# Altium PCB NaiS6202HD_0.7.PcbDoc (part 1 of 2)
Units mm, origin at the board's own origin, x right, y up, seen from the top; angles counter-clockwise.
Board outline 60 x 38 mm, 4 copper layers (Top, INT1, GND, Bottom), stack 0.965 mm thick; 148 components, 224 nets, 688 pads, 333 vias.
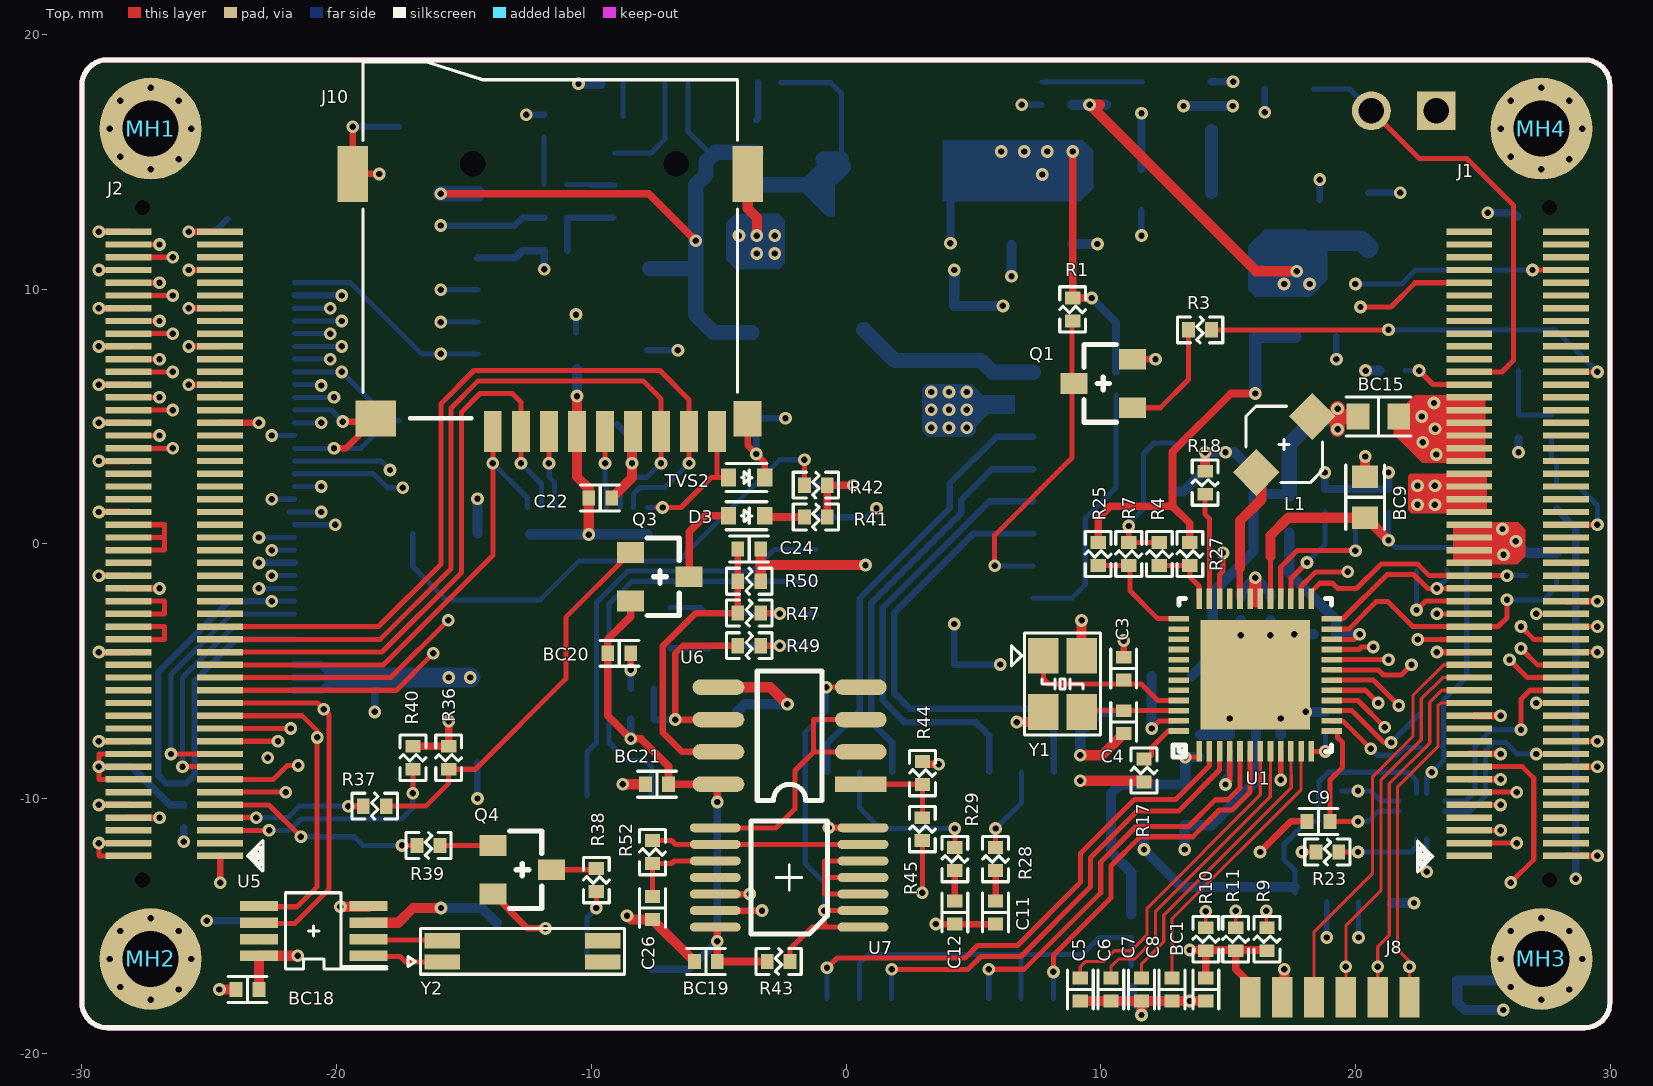
[diagram p0: Top view]
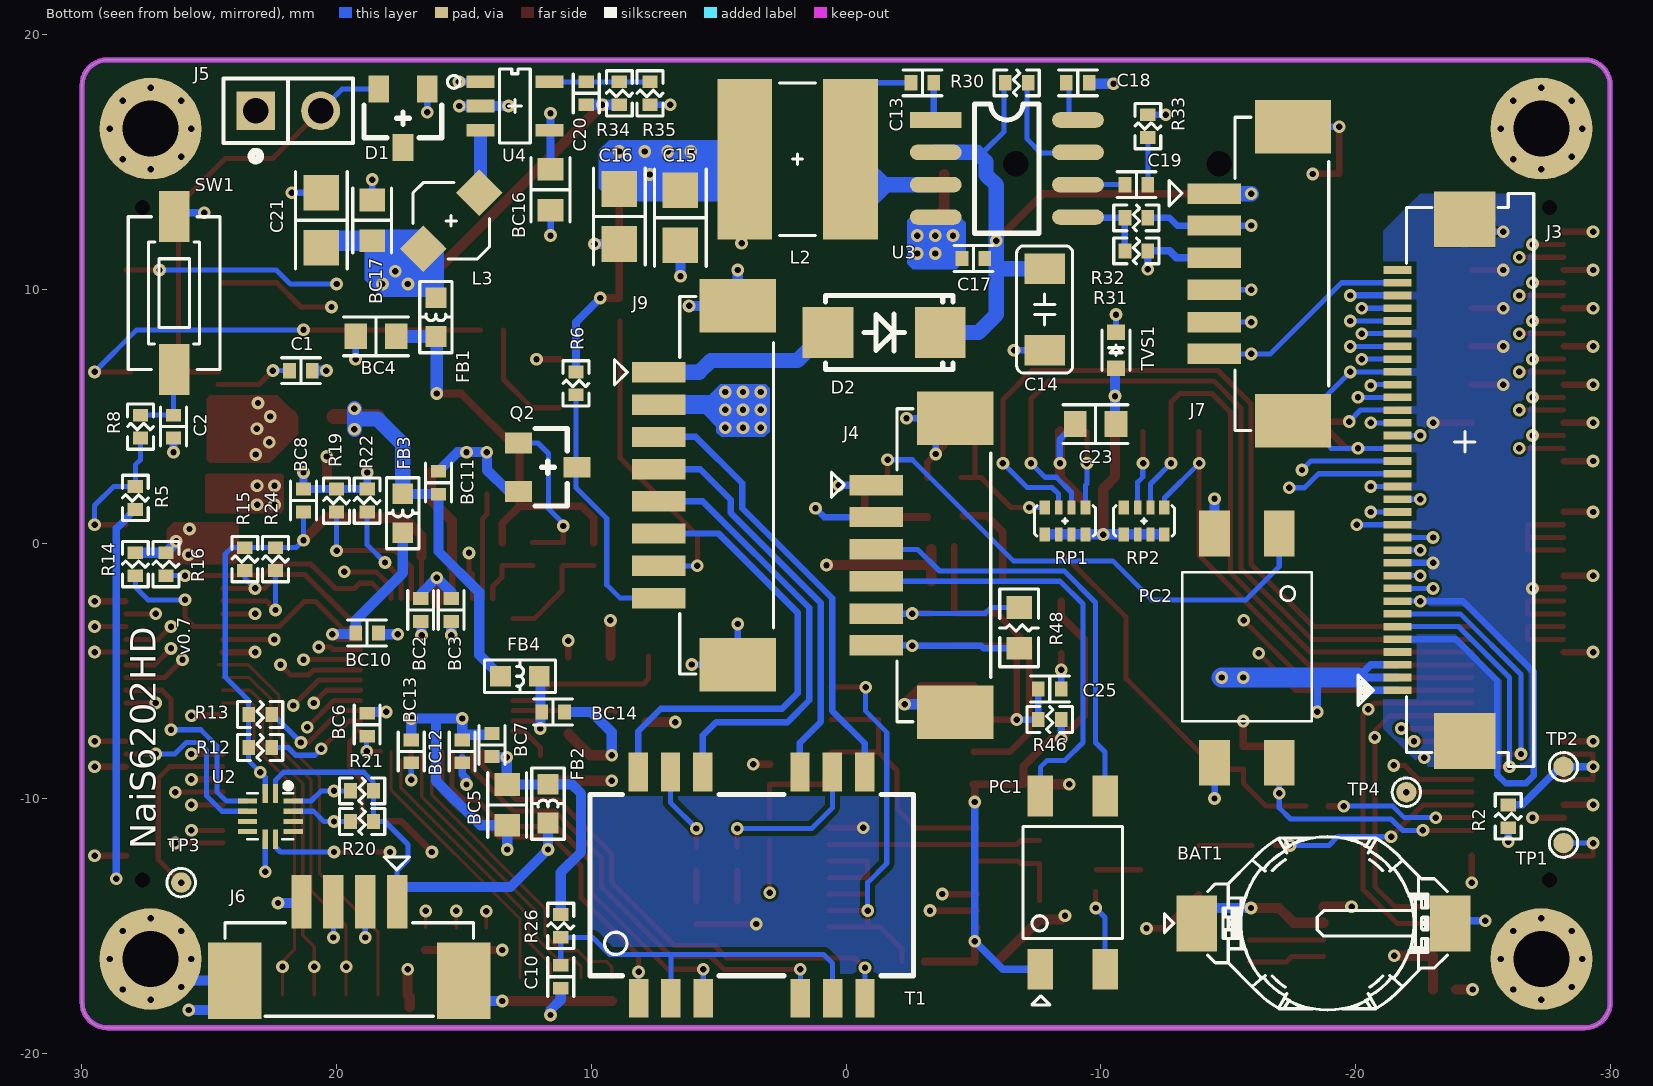
[diagram p1: Bottom view, seen from below]
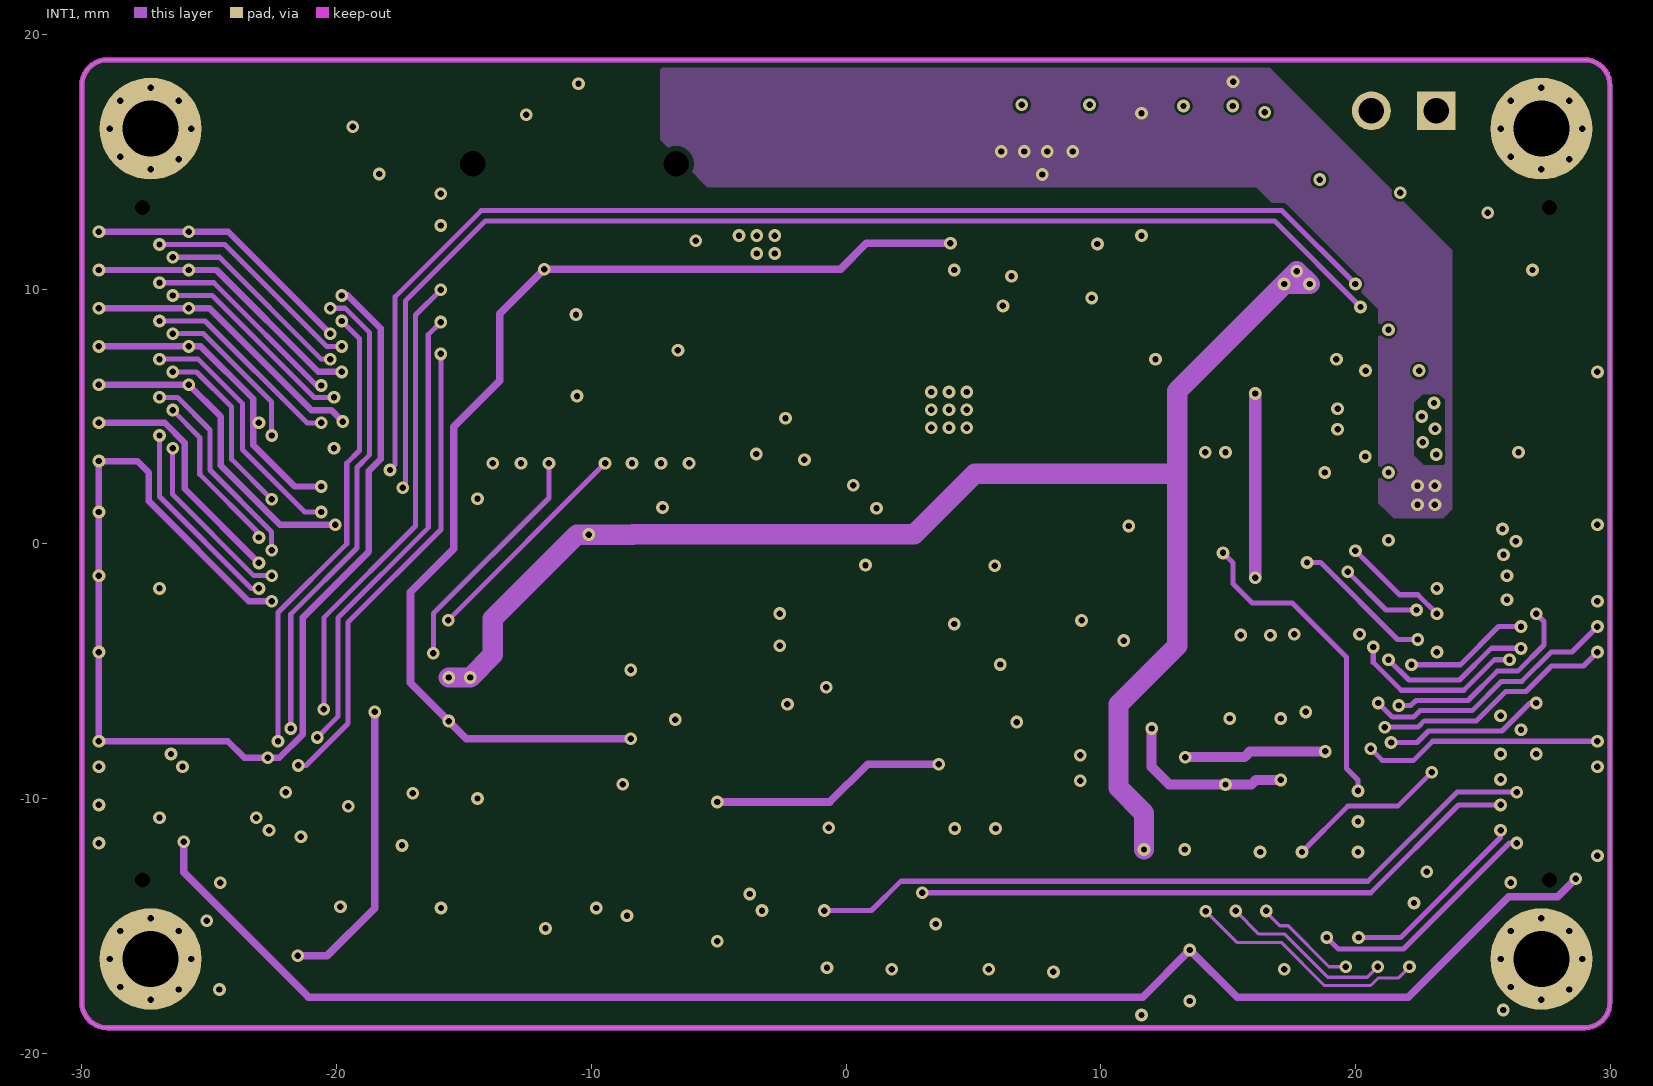
[diagram p2: INT1]
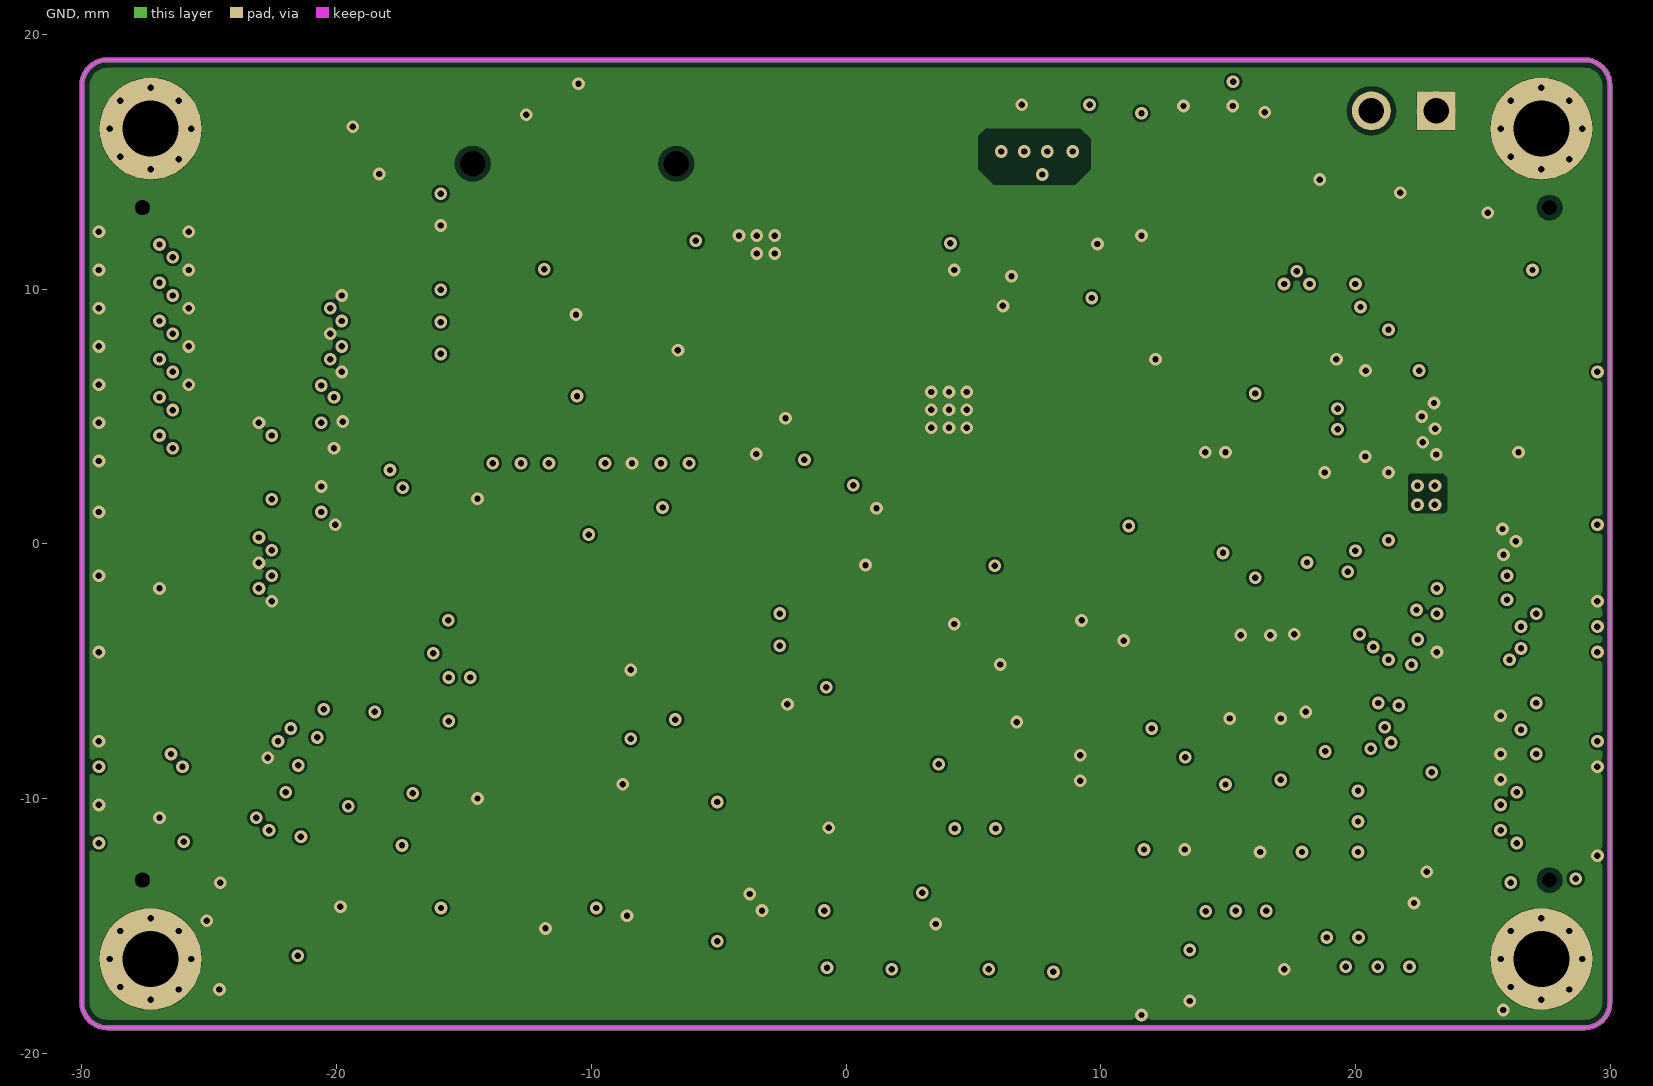
[diagram p3: GND]

## Layer stack, top to bottom
Solder Mask Top: solder mask 0.0102, Solder Resist, Dk 3.5
Top: signal copper 0.0343
Dielectric 1: dielectric 0.254, FR-4, Dk 4.3
INT1: signal copper 0.0343
Dielectric2: dielectric 0.254, FR-4, Dk 4.3
GND: signal copper 0.0343
Dielectric4: dielectric 0.32, FR-4, Dk 4.8
Bottom: signal copper 0.0343
Solder Mask Bottom: solder mask 0.0102, Solder Resist, Dk 3.5

## Board outline
-30,-18 -30,18 cw(c-29,18) -29,19 28.994,19 cw(c28.994,18) 29.994,18 30,18 30,-18 29.994,-18 cw(c28.994,-18) 28.994,-19 -29,-19 cw(c-29,-18)

## Design rules (kind name [scope] priority, off if disabled: settings)
AssemblyTestPointUsage [All] p1 off:
AssemblyTestpoint [All] p1 off: testpointundercomponent=TRUE minsize=1.016 maxsize=2.54 preferedsize=1.524 minholesize=0 maxholesize=1.016 preferedholesize=0.813 testpointgrid=0.025 usegrid=TRUE gridtolerance=0 allowsidetop=TRUE allowsidebottom=TRUE
Clearance Clearance_6 [InNet('+12V') or InNet('N21617464') or InNet('+5.0V')  or InNet('+3.3V') vs IsFill] p1: gap=0.4
Clearance Clearance_4 [InComponent('MH1') OR InComponent('MH2') OR InComponent('MH3') OR InComponent('MH4') or INnet('GND') vs OnLayer('Keep-Out Layer')] p2: gap=0
Clearance Clearance_3 [InComponent('U1') or InComponent('RP1') or InComponent('RP2') or  HasFootprint('CS-0603')] p3: gap=0.127
Clearance Clearance_2 [OnLayer('Keep-Out Layer') vs InNet('GND')] p4: gap=0.1
Clearance Clearance_1 [IsVia] p5: gap=0.1
Clearance [All] p6: gap=0.2
ComponentClearance [All] p1: gap=0.01 collisioncheckmode=3 verticalgap=0 showdistances=FALSE
DiffPairsRouting [All] p1 off: maxlimit=0.254 minlimit=0.2 mostfreqgap=0.254 toplayer_prefgap=0.2 toplayer_minwidth=0.2 toplayer_maxwidth=0.381 toplayer_prefwidth=0.254 midlayer1_mingap=0.254 midlayer1_minwidth=0.381 midlayer1_maxwidth=0.381 midlayer1_prefwidth=0.381 midlayer2_mingap=0.254 midlayer2_minwidth=0.381 midlayer2_maxwidth=0.381 midlayer2_prefwidth=0.381 bottomlayer_prefgap=0.2 bottomlayer_minwidth=0.2 bottomlayer_maxwidth=0.381 bottomlayer_prefwidth=0.254 maxuncoupledlength=12.7
FabricationTestPointUsage [All] p1 off: valid=0 allowmultiple=FALSE
FabricationTestpoint [All] p1 off: side=3 testpointundercomponent=TRUE minsize=1.016 maxsize=2.54 preferedsize=1.524 minholesize=0 maxholesize=1.016 preferedholesize=0.813 testpointgrid=0.025 allowsidetop=TRUE allowsidebottom=TRUE usegrid=TRUE gridtolerance=0
FanoutControl Fanout_BGA [IsBGA] p1 off: bgadir=Out bgaviamode=Centered fanoutstyle=Auto fanoutdirection=Alternating viagrid=0.025 // Fanout_BGA (Default Rule)
FanoutControl Fanout_SOIC [IsSOIC] p3 off: bgadir=Out bgaviamode=Centered fanoutstyle=Auto fanoutdirection=Alternating viagrid=0.025 // Fanout_SOIC (Default Rule)
FanoutControl Fanout_Small [(CompPinCount < 5)] p4 off: bgadir=Out bgaviamode=Centered fanoutstyle=Auto fanoutdirection=OutThenIn viagrid=0.025 // Fanout_Small (Default Rule)
FanoutControl Fanout_Default [All] p5 off: bgadir=Out bgaviamode=Centered fanoutstyle=Auto fanoutdirection=Alternating viagrid=0.025 // Fanout_Default (Default Rule)
Height [All] p1 off: minheight=0 maxheight=25.4 prefheight=12.7
HoleSize [All] p1: absolutevalues=TRUE maxlimit=5 minlimit=0.25 maxpercent=80.000 minpercent=20.000
HoleToHoleClearance [All] p1: gap=0.2 allowstackedmicrovias=TRUE
MinimumSolderMaskSliver [All] p1: minsoldermaskwidth=0
PasteMaskExpansion [All] p1 off: expansion=0
PermittedLayers [All] p1 off: toplayerpermitted=TRUE bottomlayerpermitted=TRUE
PlaneClearance [InNet('GND')] p1 off: clearance=0.508
PlaneConnect [All] p1 off: planeconnectstyle=Direct reliefexpansion=0.508 reliefentries=4 reliefconductorwidth=0.254 reliefairgap=0.254
PolygonConnect [All] p1 off: connectstyle=Direct reliefconductorwidth=0.254 reliefentries=4 polygonreliefangle="90 Angle" airgapwidth=0.1
RoutingVias [All] p1: holewidth=0.25 width=0.5 viastyle="Through Hole" minholewidth=0.25 minwidth=0.5 maxholewidth=0.25 maxwidth=0.5
ShortCircuit [All] p1 off: allowed=FALSE
SilkToSilkClearance [All] p1: silktosilkclearance=0
SilkToSolderMaskClearance [IsPad] p1: minsilkscreentomaskgap=0 clearancetoexposedcopper=TRUE
SolderMaskExpansion [All] p1: expansion=0.102
Width Width_1 [(InNet('VDD_3.3V') OR InNet('AVDD') OR InNet('OVDD') OR InNet('DVDD'))] p1: maxlimit=2 minlimit=0.2 preferedwidth=2
Width [All] p2: maxlimit=1 minlimit=0.1 preferedwidth=0.2
9 further rules are at their usual default settings.

## Components (designator, comment, footprint, x,y, rotation, side; value= is the part's Value field where it differs from the comment)
BAT1 "CN048S-0005//SMD_BAT_HOLDER" BAT-CN048S -18.75,-14.9 r90 bottom
BC1 "0.1uF" CS-1005 14.127,-17.5 r270 top
BC2 "0.1uF" CS-1005 16.7,-2.6 r270 bottom
BC3 "0.1uF" CS-1005 15.5,-2.6 r270 bottom
BC4 "10uF" CS-1608 18.452,8.148 r0 bottom
BC5 "10uF" CS-1608 13.3,-10.25 r270 bottom
BC6 "0.1uF" CS-1005 18.8,-7.1 r90 bottom
BC7 "0.1uF" CS-1005 13.9,-7.9 r90 bottom
BC8 "0.1uF" CS-1005 21.3,1.7 r90 bottom
BC9 "10uF" CS-1608 20.381,1.827 r90 top
BC10 "0.1uF" CS-1005 18.8,-3.5 r180 bottom
BC11 "0.1uF" CS-1005 16,2.4 r90 bottom
BC12 "0.1uF" CS-1005 15.068,-8.149 r90 bottom
BC13 "0.1uF" CS-1005 17.068,-8.149 r90 bottom
BC14 "0.1uF" CS-1005 11.5,-6.6 r180 bottom
BC15 "10uF" CS-1608 20.9,5 r0 top
BC16 "0.1uF" CS-1608 11.6,13.9 r90 bottom
BC17 "1uF" CS-1608 18.6,12.7 r270 bottom
BC18 "0.1uF" CS-1005 -23.5,-17.5 r0 top
BC19 "0.1uF" CS-1005 -5.5,-16.4 r0 top
BC20 "0.1uF" CS-1005 -8.9,-4.3 r180 top
BC21 "0.1uF" CS-1005 -7.419,-9.439 r0 top
C1 "0.1uF" CS-1005 21.4,6.8 r0 bottom
C2 "1nF/NI" CS-1005 26.4,4.6 r270 bottom
C3 "12pF" CS-1005 10.9,-4.9 r270 top
C4 "12pF" CS-1005 10.9,-7 r90 top
C5 "0.1uF" CS-1005 9.2,-17.5 r270 top
C6 "0.1uF" CS-1005 10.4,-17.5 r270 top
C7 "0.1uF" CS-1005 11.6,-17.5 r270 top
C8 "0.1uF" CS-1005 12.8,-17.5 r270 top
C9 "0.1uF" CS-1005 18.55,-10.9 r180 top
C10 "0.1uF" CS-1005 11.2,-17 r270 bottom
C11 "0.1uF" CS-1005 5.873,-14.477 r270 top (schematic designator c11)
C12 "0.1uF" CS-1005 4.273,-14.477 r270 top
C13 "10nF" CS-1005 -3,18.1 r0 bottom
C14 "4.7uF-25V-3216" C3216 -7.8,9.2 r270 bottom
C15 "22uF-6.3V" CS-2012 6.5,12.8 r270 bottom
C16 "22uF-6.3V" CS-2012 8.9,12.85 r270 bottom
C17 "0.1uF" CS-1005 -5,11.2 r0 bottom
C18 "0.1uF" CS-1005 -9.1,18.1 r180 bottom
C19 "3.3nF" CS-1005 -11.4,14.1 r180 bottom
C20 "22pF" CS-1005 10.198,17.687 r90 bottom
C21 "22uF-6.3V" CS-2012 20.6,12.7 r90 bottom
C22 "0.1uF" CS-1005 -9.65,1.8 r0 top
C23 "22uF" CS-1608 -9.8,4.7 r0 bottom
C24 "2.2nF" CS-1005 -3.8,-0.2 r180 top
C25 "2.2nF" CS-1005 -8,-5.7 r0 bottom
C26 "1nF" CS-1005 -7.6,-14.3 r90 top
D1 "BAT54A" SOT-23 17.4,16.7 r270 bottom
D2 "RB051L-40" SOD-106 -1.5,8.3 r180 bottom
D3 "1N4148" SOD-523 -3.9,1.1 r180 top
FB1 "220R" LS-1608 16.1,8.9 r270 bottom
FB2 "220R" LS-1608 11.7,-10.2 r90 bottom
FB3 "220R" LS-1608 17.4,1.2 r270 bottom
FB4 "220R" LS-1608 12.8,-5.2 r180 bottom
J1 "LB222-G100S-BOR" BTB2X50-050-F-SMD 26.37,0 r180 top locked
J2 "LB208-G100P-BOR" BTB2X50-050-M-SMD -26.37,0 r180 top locked
J3 "05003HR-H34E" 05003HR-H34E -24.3,4 r270 bottom locked
J4 "12505WS-06" 12505WS-6P -2.732,-0.844 r270 bottom
J5 "PH-2PSM//NI" PH-2PSM 21.9,17 r90 bottom
J6 "12505WR-4P" 12505WS-4P 19.5,-15.6 r180 bottom
J7 "12505WS-06" 12505WS-6P -16,10.6 r270 bottom
J8 "6pin 2.54mm//NI" TP_HEADER_6 19,-17.8 r0 top
J9 "12505WS08" 12505WS-8P 5.8,2.3 r270 bottom
J10 "112J-TXAR-R" CON_U-SD -13.866,4.412 r0 top locked
L1 "CDRH2D14NP-2R2NC" CDRH2D14NP 17.2,3.9 r0 top
L2 "CDRH5D18NP-100NC-10uH" CDRH5D18NP 1.9,15.1 r180 bottom
L3 "CDRH2D14NP-2R2NC" CDRH2D14NP 15.5,12.679 r180 bottom
MH1 "4.04pi" VA-2.2 -27.3,16.3 r0 top locked
MH2 "4.04pi" VA-2.2 -27.3,-16.3 r0 top locked
MH3 "4.04pi" VA-2.2 27.3,-16.3 r0 top locked
MH4 "4.04pi" VA-2.2 27.3,16.3 r0 top locked
PC1 "ASSR-4118" ASSR-4118 -8.9,-13.3 r180 bottom
PC2 "PC817" PC817 -15.8,-4.1 r270 bottom
Q1 "MMBT6427" SOT-23 10.092,6.3 r180 top
Q2 "MMBT6427" SOT-23 11.7,3 r180 bottom
Q3 "MMBT3906" SOT-23 -7.3,-1.3 r0 top
Q4 "MMBT6427" SOT-23 -12.7,-12.8 r0 top
R1 "2.2K" RS-1005 8.9,9.2 r90 top
R2 "0" RS-1005 -26,-10.7 r90 bottom
R3 "10K" RS-1005 13.9,8.4 r0 top
R4 "10K" RS-1005 12.3,-0.4 r270 top
R5 "10K" RS-1005 27.9,1.8 r270 bottom
R6 "2.2K" RS-1005 10.6,6.3 r90 bottom
R7 "10K" RS-1005 11.1,-0.4 r270 top
R8 "0" RS-1005 27.7,4.6 r90 bottom
R9 "4.7K" RS-1005 16.527,-15.523 r270 top
R10 "4.7K" RS-1005 14.127,-15.523 r270 top
R11 "4.7K" RS-1005 15.3,-15.523 r270 top
R12 "4.7K" RS-1005 23,-8 r180 bottom
R13 "4.7K" RS-1005 23,-6.7 r180 bottom
R14 "4.7K" RS-1005 27.9,-0.8 r270 bottom
R15 "4.7K" RS-1005 23.6,-0.6 r270 bottom
R16 "4.7K" RS-1005 26.7,-0.8 r270 bottom
R17 "2.49K, 1%" RS-1005 11.7,-8.9 r90 top
R18 "4.7K" RS-1005 14.1,2.4 r270 top
R19 "4.7K" RS-1005 20,1.7 r270 bottom
R20 "40.2K" RS-1005 19,-10.9 r0 bottom
R21 "10K" RS-1005 19,-9.7 r180 bottom
R22 "4.7K" RS-1005 18.8,1.7 r270 bottom
R23 "2.2K" RS-1005 18.9,-12.1 r180 top
R24 "4.7K" RS-1005 22.4,-0.6 r90 bottom
R25 "4.7K" RS-1005 9.9,-0.4 r270 top
R26 "0//NI" RS-1005 11.2,-15 r270 bottom
R27 "4.7K" RS-1005 13.5,-0.4 r90 top
R28 "75" RS-1005 5.873,-12.377 r90 top
R29 "75" RS-1005 4.273,-12.377 r90 top
R30 "100K" RS-1005 -6.7,18.1 r180 bottom
R31 "45K, 1%" RS-1005 -11.4,11.5 r0 bottom
R32 "10K, 1%" RS-1005 -11.4,12.8 r0 bottom
R33 "2.2K" RS-1005 -11.85,16.4 r270 bottom
R34 "150K, 1%" RS-1005 8.898,17.687 r270 bottom
R35 "33.3K, 1%" RS-1005 7.698,17.687 r90 bottom
R36 "10K" RS-1005 -15.6,-8.4 r270 top
R37 "1K" RS-1005 -18.5,-10.3 r0 top
R38 "330" RS-1005 -9.8,-13.2 r90 top
R39 "1K" RS-1005 -16.391,-11.841 r0 top
R40 "10K" RS-1005 -17,-8.4 r90 top
R41 "330" RS-1005 -1.182,1.051 r180 top
R42 "2.2K" RS-1005 -1.182,2.301 r180 top
R43 "10K" RS-1005 -2.644,-16.4 r180 top
R44 "10K" RS-1005 3,-9 r90 top
R45 "100" RS-1005 2.998,-11.202 r90 top
R46 "10K" RS-1005 -8,-6.9 r180 bottom
R47 "47" RS-1005 -3.8,-2.719 r0 top
R48 "120/NI" RS-1608 -6.8,-3.3 r90 bottom
R49 "47" RS-1005 -3.8,-4 r0 top
R50 "10K" RS-1005 -3.8,-1.469 r180 top
R52 "100" RS-1005 -7.6,-12.1 r90 top
RP1 "10K" RP-4_1005 -8.6,0.9 r180 bottom
RP2 "10K" RP-4_1005 -11.7,0.9 r180 bottom
SW1 "SW PB" SWS-CTT-1131U 26.378,9.843 r90 bottom
T1 "TRC41604NL" TRC41604NL 3.706,-13.4 r180 bottom
TP1 "TPS" TP_0.8_SMD -28.17,-11.75 r90 bottom
TP2 "TPS" TP_0.8_SMD -28.17,-8.75 r90 bottom
TP3 "TPS" TP_0.8_SMD 26.1,-13.3 r90 bottom
TP4 "TPS" TP_0.8_SMD -22,-9.75 r90 bottom
TVS1 "ESD5B5.0ST1G" SOD-523 -10.6,7.6 r270 bottom
TVS2 "ESD5B5.0ST1G" SOD-523 -3.9,2.6 r180 top
U1 "YT8521SH" QFN48_6x6 16.068,-5.149 r90 top
U2 "SGM4574YUQN12G/TR" UTQFN-1.8】1.8-12L 22.6,-10.7 r270 bottom
U3 "MP1482" SOIC-8 -6.3,14.7 r270 bottom
U4 "AME5253-AEVADJ" SOT-23-5P 12.998,17.187 r270 bottom
U5 "DS1339U-33" TSSOP8-M -20.9,-15.2 r90 top
U6 "MAX3485ESA" SOIC-8 -2.2,-7.5 r90 top
U7 "74HC00MTCX" TSSOP-14 -2.232,-13.1 r180 top
Y1 "25MHz-S20P-SX32" SX-32 8.5,-5.5 r90 top
Y2 "32.768KHz-MC-146-7pF" XTS-MC-146 -12.7,-16 r0 top

## Footprints (in the part's own frame and the unit in brackets; to place one, negate y for a bottom-side part, rotate by r counter-clockwise, add the part's x,y. Pads: shape width x height; smd on the part's side, far side on the other; paste and mask are expansions set on the pad)
05003HR-H34E [mm]
  rect 0.3x1.1 smd: 1(9.75,-2.65) 2(9.25,-2.65) 3(8.75,-2.65) 4(8.25,-2.65) 5(7.75,-2.65) 6(7.25,-2.65) 7(6.75,-2.65) 8(6.25,-2.65) 9(5.75,-2.65) 10(5.25,-2.65) 11(4.75,-2.65) 12(4.25,-2.65) 13(3.75,-2.65) 14(3.25,-2.65) 15(2.75,-2.65) 16(2.25,-2.65) 17(1.75,-2.65) 18(1.25,-2.65) 19(0.75,-2.65) 20(0.25,-2.65) 21(-0.25,-2.65) 22(-0.75,-2.65) 23(-1.25,-2.65) 24(-1.75,-2.65) 25(-2.25,-2.65) 26(-2.75,-2.65) 27(-3.25,-2.65) 28(-3.75,-2.65) 29(-4.25,-2.65) 30(-4.75,-2.65) 31(-5.25,-2.65) 32(-5.75,-2.65) 33(-6.25,-2.65) 34(-6.75,-2.65)
  rect 2.184x2.413 smd: M1(11.744,-0.006) M2(-8.744,-0.006)
  silkscreen extent -9.75,-4.19 12.75,2.7
12505WS-4P [mm]
  rect 0.8x2.1 smd: 1(1.875,1.55) 2(0.625,1.55) 3(-0.625,1.55) 4(-1.875,1.55)
  rect 2.1x3 smd: 5(-4.5,-1.55) 6(4.5,-1.55)
  silkscreen extent -4.87,-2.95 4.87,3.3
12505WS-6P [mm]
  rect 0.8x2.1 smd: 1(-3.145,-1.55) 2(-1.895,-1.55) 3(-0.625,-1.55) 4(0.625,-1.55) 5(1.895,-1.55) 6(3.145,-1.55)
  rect 2.1x3 smd: M1(-5.77,1.55) M2(5.77,1.55)
  silkscreen extent -6.14,-3.31 6.14,2.95
12505WS-8P [mm]
  rect 0.8x2.1 smd: 1(-4.435,-1.55) 2(-3.165,-1.55) 3(-1.895,-1.55) 4(-0.625,-1.55) 5(0.625,-1.55) 6(1.895,-1.55) 7(3.165,-1.55) 8(4.435,-1.55)
  rect 2.1x3 smd: 9(-7.04,1.55) 10(7.04,1.55)
  silkscreen extent -7.41,-3.29 7.41,2.95
ASSR-4118 [mm]
  rect 1x1.6 smd: 1(-1.27,-3.4) 2(1.27,-3.4) 3(1.27,3.4) 4(-1.27,3.4)
  silkscreen extent -1.95,-4.8 1.95,2.2
BAT-CN048S [mm]
  rect 2.2x1.6 smd: 1(0,4.975) 2(0,-4.975)
  silkscreen extent -3.4,-4.85 3.4,6.25, body extent -3.39,-5.22 3.31,5.18, height 2.8
BTB2X50-050-F-SMD [mm]
  rect 1.8x0.25 smd: 1(1.9,12.25) 2(-1.9,12.25) 3(1.9,11.75) 4(-1.9,11.75) 5(1.9,11.25) 6(-1.9,11.25) 7(1.9,10.75) 8(-1.9,10.75) 9(1.9,10.25) 10(-1.9,10.25) 11(1.9,9.75) 12(-1.9,9.75) 13(1.9,9.25) 14(-1.9,9.25) 15(1.9,8.75) 16(-1.9,8.75) 17(1.9,8.25) 18(-1.9,8.25) 19(1.9,7.75) 20(-1.9,7.75) 21(1.9,7.25) 22(-1.9,7.25) 23(1.9,6.75) 24(-1.9,6.75) 25(1.9,6.25) 26(-1.9,6.25) 27(1.9,5.75) 28(-1.9,5.75) 29(1.9,5.25) 30(-1.9,5.25) 31(1.9,4.75) 32(-1.9,4.75) 33(1.9,4.25) 34(-1.9,4.25) 35(1.9,3.75) 36(-1.9,3.75) 37(1.9,3.25) 38(-1.9,3.25) 39(1.9,2.75) 40(-1.9,2.75) 41(1.9,2.25) 42(-1.9,2.25) 43(1.9,1.75) 44(-1.9,1.75) 45(1.9,1.25) 46(-1.9,1.25) 47(1.9,0.75) 48(-1.9,0.75) 49(1.9,0.25) 50(-1.9,0.25) 51(1.9,-0.25) 52(-1.9,-0.25) 53(1.9,-0.75) 54(-1.9,-0.75) 55(1.9,-1.25) 56(-1.9,-1.25) 57(1.9,-1.75) 58(-1.9,-1.75) 59(1.9,-2.25) 60(-1.9,-2.25) 61(1.9,-2.75) 62(-1.9,-2.75) 63(1.9,-3.25) 64(-1.9,-3.25) 65(1.9,-3.75) 66(-1.9,-3.75) 67(1.9,-4.25) 68(-1.9,-4.25) 69(1.9,-4.75) 70(-1.9,-4.75) 71(1.9,-5.25) 72(-1.9,-5.25) 73(1.9,-5.75) 74(-1.9,-5.75) 75(1.9,-6.25) 76(-1.9,-6.25) 77(1.9,-6.75) 78(-1.9,-6.75) 79(1.9,-7.25) 80(-1.9,-7.25) 81(1.9,-7.75) 82(-1.9,-7.75) 83(1.9,-8.25) 84(-1.9,-8.25) 85(1.9,-8.75) 86(-1.9,-8.75) 87(1.9,-9.25) 88(-1.9,-9.25) 89(1.9,-9.75) 90(-1.9,-9.75) 91(1.9,-10.25) 92(-1.9,-10.25) 93(1.9,-10.75) 94(-1.9,-10.75) 95(1.9,-11.25) 96(-1.9,-11.25) 97(1.9,-11.75) 98(-1.9,-11.75) 99(1.9,-12.25) 100(-1.9,-12.25)
  round 0.5 hole 0.6: M1(-1.25,-13.2) M2(-1.25,13.2)
  silkscreen extent 3.32,11.67 3.92,12.87
BTB2X50-050-M-SMD [mm]
  rect 1.8x0.25 smd: 1(-1.8,12.25) 2(1.8,12.25) 3(-1.8,11.75) 4(1.8,11.75) 5(-1.8,11.25) 6(1.8,11.25) 7(-1.8,10.75) 8(1.8,10.75) 9(-1.8,10.25) 10(1.8,10.25) 11(-1.8,9.75) 12(1.8,9.75) 13(-1.8,9.25) 14(1.8,9.25) 15(-1.8,8.75) 16(1.8,8.75) 17(-1.8,8.25) 18(1.8,8.25) 19(-1.8,7.75) 20(1.8,7.75) 21(-1.8,7.25) 22(1.8,7.25) 23(-1.8,6.75) 24(1.8,6.75) 25(-1.8,6.25) 26(1.8,6.25) 27(-1.8,5.75) 28(1.8,5.75) 29(-1.8,5.25) 30(1.8,5.25) 31(-1.8,4.75) 32(1.8,4.75) 33(-1.8,4.25) 34(1.8,4.25) 35(-1.8,3.75) 36(1.8,3.75) 37(-1.8,3.25) 38(1.8,3.25) 39(-1.8,2.75) 40(1.8,2.75) 41(-1.8,2.25) 42(1.8,2.25) 43(-1.8,1.75) 44(1.8,1.75) 45(-1.8,1.25) 46(1.8,1.25) 47(-1.8,0.75) 48(1.8,0.75) 49(-1.8,0.25) 50(1.8,0.25) 51(-1.8,-0.25) 52(1.8,-0.25) 53(-1.8,-0.75) 54(1.8,-0.75) 55(-1.8,-1.25) 56(1.8,-1.25) 57(-1.8,-1.75) 58(1.8,-1.75) 59(-1.8,-2.25) 60(1.8,-2.25) 61(-1.8,-2.75) 62(1.8,-2.75) 63(-1.8,-3.25) 64(1.8,-3.25) 65(-1.8,-3.75) 66(1.8,-3.75) 67(-1.8,-4.25) 68(1.8,-4.25) 69(-1.8,-4.75) 70(1.8,-4.75) 71(-1.8,-5.25) 72(1.8,-5.25) 73(-1.8,-5.75) 74(1.8,-5.75) 75(-1.8,-6.25) 76(1.8,-6.25) 77(-1.8,-6.75) 78(1.8,-6.75) 79(-1.8,-7.25) 80(1.8,-7.25) 81(-1.8,-7.75) 82(1.8,-7.75) 83(-1.8,-8.25) 84(1.8,-8.25) 85(-1.8,-8.75) 86(1.8,-8.75) 87(-1.8,-9.25) 88(1.8,-9.25) 89(-1.8,-9.75) 90(1.8,-9.75) 91(-1.8,-10.25) 92(1.8,-10.25) 93(-1.8,-10.75) 94(1.8,-10.75) 95(-1.8,-11.25) 96(1.8,-11.25) 97(-1.8,-11.75) 98(1.8,-11.75) 99(-1.8,-12.25) 100(1.8,-12.25)
  round 0.5 hole 0.6: 1(1.25,13.2) 1(1.25,-13.2)
  silkscreen extent -3.47,11.65 -2.88,12.85
C3216 [mm]
  rect 1.2x1.6 smd: 1(-1.6,0) 2(1.6,0)
  silkscreen extent -2.5,-1.1 2.5,1.1
CDRH2D14NP [mm]
  rect 1.3x1.3 smd rot 45: 1(1.1,1.1) 2(-1.1,-1.1)
  Top pour cut-out: -1.484,1.116 -1.504,-0.621 -0.625,-1.5 1.025,-1.5 1.5,-1.025 1.5,0.7 0.7,1.5 -1.1,1.5
  silkscreen extent -1.5,-1.5 1.5,1.5
CDRH5D18NP [mm]
  rect 2.15x6.3 smd: 1(2.075,0) 2(-2.075,0)
  silkscreen extent -0.7,-3 0.7,3
CON_U-SD [mm]
  rect 0.7x1.6 smd: 1(0,0) 2(1.105,0) 3(2.201,0) 4(3.303,0) 5(4.407,0) 6(5.504,0) 7(6.6,0) 8(7.705,0) CD(8.801,0)
  rect 1.1x1.4 smd: 9(10.006,0.499)
  rect 1.6x1.4 smd: 10(-4.596,0.508)
  rect 1.2x2.2 smd: 11(10.012,10.108) 12(-5.497,10.108)
  round 0 hole 1: 13(7.198,10.509)
  round 0.3 hole 1: 14(-0.79,10.513)
  silkscreen extent -5.1,0.48 9.6,14.51
CS-1005 [mm]
  rect 0.5x0.6 smd: 1(-0.45,0) 2(0.45,0)
  silkscreen extent -0.76,-0.51 0.76,0.51
CS-1608 [mil]
  rect 35x40 smd: 1(-31.5,0) 2(31.5,0)
  silkscreen extent -50,-30 50,30
CS-2012 [mil]
  rect 55x55 smd: 1(-42.5,0) 2(42.5,0)
  silkscreen extent -75,-40 75,40
LS-1608 [mil]
  rect 32x32 smd: 1(-30,0) 2(30,0)
  silkscreen extent -55,-25 55,25
PC817 [mm]
  rect 1.8x1.2 smd: 1(-4.506,1.208) 2(-4.506,-1.332) 3(4.494,-1.332) 4(4.494,1.208)
  silkscreen extent -2.98,-2.6 2.86,2.48
PH-2PSM [mil]
  rect 60x60 hole 39.37: 1(0,50)
  round 60 hole 39.37: 2(0,-50)
  silkscreen extent -80,-100 50,100
QFN48_6x6 [mm]
  rrect0% 0.8x0.22 smd: 1(-3,2.2) 2(-3,1.8) 3(-3,1.4) 4(-3,1) 5(-3,0.6) 6(-3,0.2) 7(-3,-0.2) 8(-3,-0.6) 9(-3,-1) 10(-3,-1.4) 11(-3,-1.8) 12(-3,-2.2) 25(3,-2.2) 26(3,-1.8) 27(3,-1.4) 28(3,-1) 29(3,-0.6) 30(3,-0.2) 31(3,0.2) 32(3,0.6) 33(3,1) 34(3,1.4) 35(3,1.8) 36(3,2.2)
  rrect0% 0.22x0.8 smd: 13(-2.2,-3) 14(-1.8,-3) 15(-1.4,-3) 16(-1,-3) 17(-0.6,-3) 18(-0.2,-3) 19(0.2,-3) 20(0.6,-3) 21(1,-3) 22(1.4,-3) 23(1.8,-3) 24(2.2,-3) 37(2.2,3) 38(1.8,3) 39(1.4,3) 40(1,3) 41(0.6,3) 42(0.2,3) 43(-0.2,3) 44(-0.6,3) 45(-1,3) 46(-1.4,3) 47(-1.8,3) 48(-2.2,3)
  rect 4.3x4.3 smd: M1(0,0)
  silkscreen extent -3.22,-3 3,3.22
RP-4_1005 [mm]
  rect 0.406x0.55 smd: 1(-0.8,0.525) 2(-0.8,-0.525) 7(0.8,0.525) 8(0.8,-0.525)
  rect 0.305x0.55 smd: 3(-0.25,0.525) 4(-0.25,-0.525) 5(0.25,0.525) 6(0.25,-0.525)
  silkscreen extent -1.2,-0.6 1.2,0.6
RS-1005 [mm]
  rect 0.5x0.6 smd: 1(-0.45,0) 2(0.45,0)
  silkscreen extent -0.89,-0.51 0.89,0.51
RS-1608 [mil]
  rect 35x40 smd: 1(-31.5,0) 2(31.5,0)
  silkscreen extent -60,-30 60,30
SOD-106 [mm]
  rrect0% 2x2 smd: 1(-2.2,0) 2(2.2,0)
  silkscreen extent -2.3,-1.45 2.7,1.45
SOD-523 [mm]
  rect 0.6x0.7 smd: 1(0.71,0) 2(-0.71,0)
  silkscreen extent -0.8,-0.55 0.8,0.55
SOIC-8 [mil]
  rect 24x80 smd: 1(-76.34,-109.45)
  oval 24x80 smd: 2(-26.34,-109.45) 3(23.66,-109.45) 4(73.66,-109.45) 5(73.66,110.55) 6(23.66,110.55) 7(-26.34,110.55) 8(-76.34,110.55)
  silkscreen extent -101,-49 99,51
SOT-23 [mil]
  rect 42x32 smd: 1(-45.45,37.75) 2(-45.45,-37.35) 3(44.85,0.2)
  silkscreen extent -20,-60 30,60
SOT-23-5P [mm]
  rect 0.5x1.1 smd: 1(-0.95,-1.35) 2(0,-1.35) 3(0.95,-1.35) 4(0.95,1.35) 5(-0.95,1.35)
  silkscreen extent -1.45,-2.65 1.45,0.6
SWS-CTT-1131U [mm]
  rect 2x1.2 smd: 1(-3,0) 2(3,0)
  silkscreen extent -3,-1.8 3,1.8
SX-32 [mm]
  rect 1.4x1.2 smd: 1(1.1,0.75) 2(-1.1,0.75) 3(-1.1,-0.75) 4(1.1,-0.75)
  silkscreen extent -2,-1.5 2,2
TP_0.8_SMD [mm]
  round 0.8 smd: 1(0,0)
  silkscreen extent -0.56,-0.56 0.56,0.56
TP_HEADER_6 [mm]
  rect 0.8x1.6 smd: 1(-3.125,0) 2(-1.875,0) 3(-0.625,0) 4(0.625,0) 5(1.875,0) 6(3.125,0)
TRC41604NL [mm]
  rect 0.76x1.52 smd: 1(-4.436,-4.445) 2(-3.168,-4.445) 3(-1.898,-4.445) 6(1.912,-4.445) 7(3.182,-4.445) 8(4.452,-4.445) 9(4.438,4.445) 10(3.168,4.445) 11(1.898,4.445) 14(-1.912,4.445) 15(-3.182,4.445) 16(-4.452,4.445)
  silkscreen extent -6.35,-3.56 6.35,3.56
TSSOP8-M [mm]
  rect 0.4x1.5 smd: 1(-0.975,-2.15) 2(-0.325,-2.15) 3(0.325,-2.15) 4(0.975,-2.15) 5(0.975,2.15) 6(0.325,2.15) 7(-0.325,2.15) 8(-0.975,2.15)
  silkscreen extent -1.5,-2.88 1.5,1.1
TSSOP-14 [mm] "TSOP, 16-Leads, Body 5x4.4mm, Pitch 0.65mm, IPC Low Density"
  oval 2x0.35 smd: 1(-2.9,1.95) 2(-2.9,1.3) 3(-2.9,0.65) 4(-2.9,0) 5(-2.9,-0.65) 6(-2.9,-1.3) 7(-2.9,-1.95) 8(2.9,-1.95) 9(2.9,-1.3) 10(2.9,-0.65) 11(2.9,0) 12(2.9,0.65) 13(2.9,1.3) 14(2.9,1.95)
  silkscreen extent -1.5,-2.22 1.5,2.23
UTQFN-1.8】1.8-12L [mm]
  rect 0.75x0.2 smd: 1(-0.9,0.2) 2(-0.9,-0.2) 7(0.9,-0.2) 8(0.9,0.2)
  rect 0.2x0.75 smd: 3(-0.6,-0.9) 4(-0.2,-0.9) 5(0.2,-0.9) 6(0.6,-0.9) 9(0.6,0.9) 10(0.2,0.9) 11(-0.2,0.9) 12(-0.6,0.9)
  silkscreen extent -1.3,-0.9 0.9,0.9
VA-2.2 [mm]
  rrect100% 4x4 hole 2.2: 1(0,0)
XTS-MC-146 [mm]
  rect 1.4x0.6 smd: 1(-3.15,-0.42) 2(3.15,-0.42) 3(3.15,0.42) 4(-3.15,0.42)
  silkscreen extent -4.5,-0.9 4,0.9

## Via types
v1: diameter 0.5, hole 0.25, Top to Bottom, tented both sides, 189 vias
v2: diameter 0.5, hole 0.25, Top to Bottom, 144 vias

## Nets (pads, with @x,y where several pads share a name; then routed paths per layer and width w, separated by ;. In a path a pad name is that pad's centre, name@x,y a point inside that pad or via, vN(x,y) a via of type N, cw(c..) or ccw(c..) an arc to the next point about the centre after c; other vN are vias at no path point)
1.8VCORE: J2.14 J2.16 J2.18 R2.2 TP2.1 | length 8.4
  Top w0.2: J2.14@-28.17,-9.25 -29.331,-9.25 v1(-29.331,-8.75) ; J2.16@-28.17,-8.75 v1(-29.331,-8.75) ; J2.18@-28.17,-8.25 -29.331,-8.25 v1(-29.331,-8.75)
  Bottom w0.3: v1(-29.331,-8.75) TP2.1@-28.17,-8.75 -28.05,-8.75 -26.55,-10.25 R2.2@-26,-10.25
1V8_IO67: J1.68
1V8_IO68: J1.70
1V8_IO72: J1.72
1V8_IO73: J1.74
1V8_IO74: J1.76
1V8_IO82: J1.66
1V8_IO92: J2.59
1V8_IO93: J2.61
1V8_IO94: J2.51
1V8_IO95: J2.53
1V8_IO96: J2.57
1V8_IO104: J2.30
1V8_IO105: J2.32
1V8_IO106: J2.26
1V8_IO107: J2.28
1V8_IO118: J2.19 J3.30 | length 22.2
  Top w0.2: J2.19@-24.57,-7.75 v2(-22.3,-7.75)
  INT1 w0.2: v2(-22.3,-7.75) -22.3,-2.7 -19.6,0 -19.6,3.166 -19.1,3.666 -19.1,8.05 v1(-19.8,8.75)
  Bottom w0.2: J3.30@-21.65,8.75 v1(-19.8,8.75)
1V8_IO119: J2.21 J3.31 | length 22.9
  Top w0.2: J2.21@-24.57,-7.25 v2(-21.8,-7.25)
  INT1 w0.2: v2(-21.8,-7.25) -21.8,-2.766 -19.2,-0.166 -19.2,3 -18.7,3.5 -18.7,8.286 -19.664,9.25 v1(-20.25,9.25)
  Bottom w0.2: J3.31@-21.65,9.25 v1(-20.25,9.25)
3.3VCORE: J2.2 J2.4 TP1.1 | length 4
  Top w0.2: J2.2@-28.17,-12.25 -29.331,-12.25 v1(-29.331,-11.75) J2.4@-28.17,-11.75
  Bottom w0.2: v1(-29.331,-11.75) TP1.1@-28.17,-11.75
3V3_IO114: J1.11 R43.1 U6.4 U7.1 U7.2 | length 47.5
  Top w0.2: R43.1@-2.194,-16.4 -2.194,-15.912 -1.332,-15.05 -0.85,-15.05 ; v2(-0.771,-5.629) U6.4@0.58,-5.629 ; U7.1@0.668,-15.05 -0.85,-15.05 ; U7.2@0.668,-14.4 v2(-0.85,-14.4) -0.85,-15.05 ; J1.11@24.47,-9.75 v1(26.337,-9.75)
  INT1 w0.2: v2@-0.682,-14.4 1,-14.4 2.152,-13.248 20.486,-13.248 23.984,-9.75 v1(26.337,-9.75)
  Bottom w0.2: v2(-0.85,-14.4) -0.85,-13.304 -1.6,-12.554 -1.6,-7.4 -0.771,-6.571 v2(-0.771,-5.629)
3V3_IO115: J1.9 R45.1 | length 27.4
  Top w0.2: v2(2.998,-13.698) R45.1@2.998,-11.652 ; J1.9@24.47,-10.25 v1(25.7,-10.25)
  INT1 w0.2: v2(2.998,-13.698) 3,-13.7 20.6,-13.7 24.05,-10.25 v1(25.7,-10.25)
3V3_IO124: J2.9 R39.1 | length 8.4
  Top w0.2: J2.9@-24.57,-10.25 -22.65,-10.25 v2(-21.4,-11.5) ; v2(-17.433,-11.841) R39.1@-16.841,-11.841
  Bottom w0.2: v2(-21.4,-11.5) -19.3,-11.5 -18.959,-11.841 v2(-17.433,-11.841)
3V3_IO125: J2.7 R37.1 | length 5.8
  Top w0.2: J2.7@-24.57,-10.75 v2(-23.15,-10.75)
  Top w0.254: v2(-19.542,-10.3) R37.1@-18.95,-10.3
  Bottom w0.2: v2(-23.15,-10.75) -21.916,-10.75 -21.466,-10.3 v2(-19.542,-10.3)
3V3_IO126: J2.5 PC2.4 R40.1 | length 10.6
  Top w0.2: J2.5@-24.57,-11.25 v2(-22.65,-11.25) ; v2@-17,-9.784 R40.1@-17,-8.85
  Bottom w0.2: v2(-22.65,-11.25) -21.85,-11.25 -21.4,-10.8 -17.446,-10.8 -17.008,-10.362 v2(-17.008,-9.792) PC2.4@-17.008,-8.594
3V3_IO127: J2.3
+1.8V: BC1.1 J8.1 R2.1 R5.2 R9.2 R10.2 R11.2 | length 82.9
  Top w0.3: v1(13.5,-15.946) R10.2@14.127,-15.946 ; BC1.1@14.127,-17.05 R10.2@14.127,-15.973 R10.2@14.127,-15.946 ; R11.2@15.3,-15.973 15.3,-16.7 15.875,-17.275 J8.1@15.875,-17.8 ; R9.2@16.527,-15.946 R10.2@14.127,-15.946
  INT1 w0.3: v2(-26,-11.7) -26,-12.9 -21.1,-17.8 11.646,-17.8 v1(13.5,-15.946) 15.354,-17.8 22.075,-17.8 26.025,-13.85 27.95,-13.85 v2(28.65,-13.15)
  Bottom w0.3: v2(-26,-11.7) R2.1@-26,-11.15 ; R5.2@27.9,1.35 28.65,0.6 v2(28.65,-13.15)
+3.3V: BC17.2 BC18.2 C20.1 C21.1 C22.1 C23.1 FB1.1 FB2.1 J3.1 J3.2 J3.3 J6.1 J10.4 L3.2 R20.1 R21.2 R34.2 RP1.2 RP1.4 RP1.6 RP1.8 RP2.2 RP2.4 RP2.6 RP2.8 TVS1.1 U2.1 U5.8 | length 131.5
  Top w0.4: BC18.2@-23.05,-17.5 U5.8@-23.05,-16.175 v2(-21.525,-16.175) ; v2(-10.563,5.8) J10.4@-10.563,4.412 -10.563,2.621 -10.1,2.158 C22.1@-10.1,1.8 v2(-10.1,0.363) ; 9.963,17.237 v2(9.563,17.237) 16.1,10.7 v2(17.7,10.7)
  INT1 w0.3: v2(-21.525,-16.175) -20.375,-16.175 -18.5,-14.3 v2(-18.5,-6.6)
  INT1 w0.8: v2(-15.6,-5.25) v2(-14.75,-5.25) -13.863,-4.363 -13.863,-2.937 -10.563,0.363 -8.362,0.363 ; -8.362,0.375 2.675,0.375 5.055,2.755 13,2.755 ; v2(11.7,-12) 11.7,-10.581 10.7,-9.581 10.7,-6.3 13,-4 13,6 v2(17.2,10.2) ; v2(17.2,10.2) v2(18.2,10.2) v2(17.7,10.7) v2(17.2,10.2)
  Bottom w0.2: J6.1@17.625,-13.7 17.625,-13.474 17.625,-12.825 17.2,-12.4 17.2,-11.8 18.1,-10.9 R20.1@18.55,-10.9 R21.2@18.55,-9.7 ; R21.2@18.566,-9.7 18.566,-9.334 18.932,-8.968 22.087,-8.968 22.4,-9.281 U2.1@22.4,-9.8
  Bottom w0.3: J3.1@-21.65,-5.75 -20.56,-5.75 -20.11,-5.3 -20.11,-5.25 -20.61,-4.75 J3.3@-21.65,-4.75 ; J3.2@-21.65,-5.25 -20.26,-5.25 ; v2(-18.5,-6.6) -18.5,-5.35
  Bottom w0.4: RP2.8@-12.4,0.375 RP1.8@-9.4,0.375 RP1.6@-8.85,0.375 RP1.4@-8.35,0.375 RP1.2@-7.8,0.375 ; C23.1@-10.563,4.737 v2(-10.563,5.8) TVS1.1@-10.563,6.853 ; R34.2@8.898,17.237 v2(9.563,17.237) C20.1@10.198,17.237 ; FB2.1@11.7,-10.962 v2(11.7,-12) 13.174,-13.474 J6.1@17.625,-13.474
  Bottom w0.8: -20.11,-5.25 v2(-15.6,-5.25) v2(-14.75,-5.25) ; 17.9,11.9 20.221,11.9 C21.1@20.5,11.62
+5.0V: BC16.2 BC19.2 BC20.2 BC21.2 C15.1 C16.1 J1.55 J1.57 J1.59 J1.61 J7.3 L2.2 PC1.1 Q3.2 R1.2 R6.2 R31.1 R36.1 R40.2 R43.2 R44.2 R46.2 U4.1 U4.4 U6.8 U7.14 | length 100.2
  Top w0.3: R40.2@-17,-7.95 R36.1@-15.598,-7.95 ; R36.1@-15.6,-7.95 v2(-15.6,-6.96) ; Q3.2@-8.454,-2.249 -8.454,-2.854 -9.35,-3.75 BC20.2@-9.35,-4.3 -9.35,-6.75 v2(-8.45,-7.65) -8.05,-7.65 -6.969,-8.731 BC21.2@-6.969,-9.439 U6.8@-5.008,-9.439 ; U7.14@-5.132,-15.05 -5.05,-15.132 v2(-5.05,-15.6) BC19.2@-5.05,-16.4 R43.2@-3.094,-16.4 ; v2(-5.05,-10.134) U6.8@-5.05,-9.481 ; R44.2@2.998,-8.652 v2(3.643,-8.652) ; v2(8.9,15.4) R1.2@8.9,9.65 v2(9.65,9.65)
  INT1 w0.3: v2(-8.45,-7.65) -14.91,-7.65 v2(-15.6,-6.96) -17.1,-5.46 -17.1,-1.896 -15.4,-0.196 -15.4,4.6 -13.6,6.4 -13.6,9.034 v2(-11.85,10.784) -0.216,10.784 0.8,11.8 v2(4.1,11.8) ; v2(-5.05,-10.134) -0.634,-10.134 0.848,-8.652 v2(3.643,-8.652)
  Bottom w0.3: J7.3@-14.45,11.225 -12.975,11.225 -12.7,11.5 R31.1@-11.85,11.5 v2(-11.85,10.784) ; v2(-8.45,-7.65) R46.2@-8.45,-6.9 ; PC1.1@-7.63,-16.7 -6.15,-16.7 v2(-5.05,-15.6) ; v2(-5.05,-10.134) v2(-5.05,-15.6) ; v2@-5.008,-15.558 v2(-5.05,-15.6) ; v2(4.1,11.8) L2.2@4.1,14.975 ; v2(9.65,9.65) 10.6,8.7 R6.2@10.6,6.75 ; BC16.2@11.6,14.7 v1(11.6,16.9) ; U4.1@14.348,18.137 v2(15.198,18.137)
  other v1: 22.435,1.53 23.12,1.53 22.435,2.28 23.12,2.28
  other v2: 7.7,14.5 6.1,15.4 7,15.4 7.9,15.4
+12V: C14.1 C17.1 D2.2 J7.1 R30.1 U3.2 | length 27.6
  Top w0.3: v2@-15.855,13.745 -7.745,13.745 v2(-5.9,11.9)
  Bottom w0.2: R30.1@-6.2,18.064 -6.2,16.179 -5.5,15.479
  Bottom w0.6: v2(-15.905,13.745) J7.1@-14.45,13.745 ; C14.1@-7.7,10.8 -5.9,10.8 ; D2.2@-3.7,8.3 -5.2,8.3 -5.9,9 -5.9,10.8 ; U3.2@-3.52,15.369 -5.131,15.369 -5.5,15 -5.5,14.482 -5.9,14.082 v2(-5.9,11.9) -5.9,10.8
ADCOUT_C: J2.60
AVDD33: BC5.1 BC6.1 BC7.1 FB2.2 R26.1 U1.1 U1.12 | length 17.1
  Top w0.2: v1(13.318,-8.374) 13.861,-8.374 U1.1@13.868,-8.382 ; U1.12@18.268,-8.149 v1(18.818,-8.149)
  INT1 w0.4: v1(13.318,-8.374) 15.643,-8.374 15.868,-8.149 v1(18.818,-8.149)
  Bottom w0.2: v1(18.818,-8.149) BC6.1@18.818,-7.499
  Bottom w0.4: R26.1@11.2,-14.55 11.2,-12.9 10.4,-12.1 10.4,-9.8 10.762,-9.438 FB2.2@11.7,-9.438 ; FB2.2@11.7,-9.45 BC5.1@13.3,-9.45 13.318,-9.433 v1(13.318,-8.374) BC7.1@13.875,-8.374
AVDDL_1V2: BC12.1 BC13.1 BC14.1 FB4.2 U1.4 U1.9 U1.47 | length 14.5
  Top w0.2: v1(12,-7.249) 12.3,-6.949 U1.47@13.068,-6.949 ; v1(14.9,-9.449) 15.068,-9.282 U1.4@15.068,-8.149 ; v1(17.068,-9.268) U1.9@17.068,-8.149
  INT1 w0.4: v1(12,-7.249) 12,-8.76 12.69,-9.449 v1(14.9,-9.449) 15.919,-9.449 16.1,-9.268 v1(17.068,-9.268)
  Bottom w0.2: v1(17.068,-9.268) BC13.1@17.068,-8.599
  Bottom w0.3: v1(14.9,-9.449) 14.9,-9.217 15.068,-9.049 BC12.1@15.068,-8.399
  Bottom w0.4: v1(12,-7.249) FB4.2@12,-5.2
BCLK_C: J2.63
BOOT_CTL0: J1.79
BOOT_CTL1: D1.2 J1.77 J5.2 | length 17.6
  Top w0.2: J5.2@20.63,17 22.504,15.126 24.374,15.126 26.2,13.3 26.2,7.2 25.75,6.75 J1.77@24.645,6.75
  Bottom w0.2: D1.2@18.349,17.854 19.776,17.854 J5.2@20.63,17
BT_RST_IN: J1.50
BT_UART_RX: J2.22
BT_UART_TX: J2.24
BT_WAKE_IN: J1.62
BT_WAKE_OUT: J1.64
CFG_LED1: R4.2 R27.1 U1.36 | length 2.6
  Top w0.2: R4.2@12.3,-0.85 R27.1@13.5,-0.85 13.5,-1.3 13.858,-1.658 ; U1.36@13.868,-2.149 13.868,-1.668
CFG_LED2: R7.2 R25.2 U1.37 | length 4.5
  Top w0.2: R25.2@9.9,-0.85 R7.2@11.109,-0.85 ; R7.2@11.145,-0.887 11.145,-1.845 12.239,-2.939 U1.37@13.068,-2.939
DACIN_C: J2.58
DI_CON0: J4.1 R41.1 R42.1 | length 3.7
  Top w0.3: R41.1@-0.732,1.051 R42.1@-0.732,2.301 v2(0.289,2.301)
  Bottom w0.3: J4.1@-1.182,2.301 v2(0.289,2.301)
DO_COM_CON: J4.4 PC1.4 | length 17.1
  Bottom w0.2: PC1.4@-7.63,-9.9 -7.63,-8.77 -7.9,-8.5 -8.6,-8.5 -9.3,-7.8 -9.3,-2.366 -8.403,-1.469 J4.4@-1.182,-1.469
DO_CON0: J4.3 PC1.3 | length 17.2
  Bottom w0.2: PC1.3@-10.17,-9.9 -10.17,-8.17 -9.8,-7.8 -9.8,-2.3 -8.569,-1.069 -3.669,-1.069 -2.819,-0.219 J4.3@-1.182,-0.219
DRIVE_WS2812_3V3: J2.13 J3.33 J7.6 | length 30.3
  Top w0.2: J2.13@-24.57,-9.25 -22.49,-9.25 -21.94,-8.7 v2(-21.5,-8.7)
  INT1 w0.2: v2(-21.5,-8.7) -21.2,-8.7 -19.55,-7.05 -19.55,-3.081 -15.905,0.564 v2(-15.905,7.455)
  Bottom w0.2: J3.33@-21.65,10.25 -19.45,10.25 -16.655,7.455 v2(-15.905,7.455) J7.6@-14.45,7.455
DVDD33: BC2.1 BC3.1 BC4.1 FB1.2 R25.1 R27.2 U1.30 U1.31 | length 26.1
  Top w0.3: R25.1@9.9,0.05 9.9,1 10.381,1.481 12.819,1.481 ; R27.2@13.5,0.05 13.5,0.8 12.819,1.481 ; v1(16.063,5.9) 15.1,5.9 12.819,3.619 12.819,1.481
  Top w0.5: 16.068,-2.249 v1@16.068,-1.336
  INT1 w0.5: v1(16.063,-1.336) v1(16.063,5.9)
  Bottom w0.4: BC3.1@15.5,-2.099 15.5,-1.899 v1(16.063,-1.336) 16.663,-1.936 BC2.1@16.663,-2.103
  Bottom w0.5: v1(16.063,5.9) FB1.2@16.063,8.138 ; FB1.2@16.1,8.138 BC4.1@17.643,8.138
DVDD_RGMII: BC8.1 BC9.1 R12.1 R13.1 R15.1 R23.2 R24.2 U1.29 U2.2 | length 29.1
  Top w0.2: U1.29@16.668,-2.149 16.668,-0.5 ; v2(17.9,-12.1) R23.2@18.45,-12.1
  Top w0.4: 16.668,-0.5 16.668,0.327 17.367,1.027 BC9.1@20.381,1.027 ; BC9.1@20.399,1.045 v1(21.3,0.143)
  INT1 w0.2: v2(17.9,-12.1) 19.7,-10.3 21.664,-10.3 v1(22.993,-8.97)
  Bottom w0.2: BC8.1@21.3,1.25 v1(21.3,0.143) 21.593,-0.15 24.12,-0.15 24.37,-0.4 24.37,-5.23 23.45,-6.15 23.45,-7.9 R12.1@23.4,-7.95 ; U2.2@22.8,-9.8 22.8,-9.164 v1(22.993,-8.97) 23.45,-8.514 R12.1@23.45,-8
DVDDL: BC10.1 FB3.2 U1.22 | length 6.7
  Top w0.2: U1.22@19.068,-3.749 19.97,-3.749 v1(20.164,-3.555)
  Bottom w0.4: FB3.2@17.4,0.438 17.4,-1.149 19.25,-2.999 BC10.1@19.25,-3.549 ; BC10.1@19.384,-3.568 19.384,-3.539 v1@20.153,-3.539
DVP_D0: J1.91 J3.18 | length 56.7
  Top w0.2: v2(20.2,9.3) 21.4,9.3 22.35,10.25 J1.91@24.47,10.25
  INT1 w0.2: v2(-17.4,2.2) -17.3,2.3 -17.3,9.534 -14.155,12.679 16.821,12.679 v2(20.2,9.3)
  Bottom w0.2: J3.18@-21.65,2.75 -18.55,2.75 -18,2.2 v2(-17.4,2.2)
DVP_D1: J1.94 J3.19 | length 59.6
  Top w0.2: v2(26.95,10.75) J1.94@28.27,10.75
  INT1 w0.2: v2(-17.9,2.9) -17.7,3.1 -17.7,9.7 -14.321,13.079 17.121,13.079 v2(20,10.2)
  Bottom w0.2: J3.19@-21.65,3.25 -18.25,3.25 v2(-17.9,2.9) ; v2(20,10.2) 21.816,10.2 22.366,10.75 v2(26.95,10.75)
DVP_D2: J1.93
DVP_D3: J1.82
DVP_D4: J1.86
DVP_D5: J1.96
DVP_D6: J1.95
DVP_D7: J1.84
DVP_D8: J1.98
DVP_D9: J1.97
DVP_D10: J1.100
DVP_D11: J1.88
DVP_D12: J1.92
DVP_D13: J1.90
DVP_D14: J1.99
DVP_D15: J1.81
DVP_DEN: J1.87
DVP_HREF: J1.85
DVP_PCLK: J1.89
DVP_VSYNC: J1.83
EPHY_TRCT: C10.1 R26.2 T1.2 T1.7 | length 15.2
  Bottom w0.2: T1.7@0.524,-17.845 0.524,-16.476 0.878,-16.122 9.278,-16.122 9.95,-15.45 R26.2@11.2,-15.45 C10.1@11.2,-16.55 ; T1.2@6.874,-17.845 6.874,-16.196
ETH_INTB: J1.28 U2.3 | length 8.3
  Top w0.2: v2(26.5,-7.3) 26.5,-6.1 26.85,-5.75 J1.28@28.27,-5.75
  Bottom w0.2: U2.3@23.5,-10.1 24.334,-10.1 24.7,-9.734 24.7,-7.934 25.334,-7.3 v2(26.5,-7.3)
ETH_RST: J1.18 U2.4 | length 7.1
  Top w0.2: v1(27.1,-8.25) J1.18@28.27,-8.25
  Bottom w0.2: U2.4@23.5,-10.5 24.5,-10.5 25.1,-9.9 25.1,-8.1 25.4,-7.8 25.9,-7.8 26.35,-8.25 v1(27.1,-8.25)
FD_SW: C2.1 R8.2 SW1.1 | length 3.1
  Bottom w0.2: SW1.1@26.4,6.821 C2.1@26.4,5.05 R8.2@27.7,5.05
FS_C: J2.62